# Allegro board touchcontroller.brd
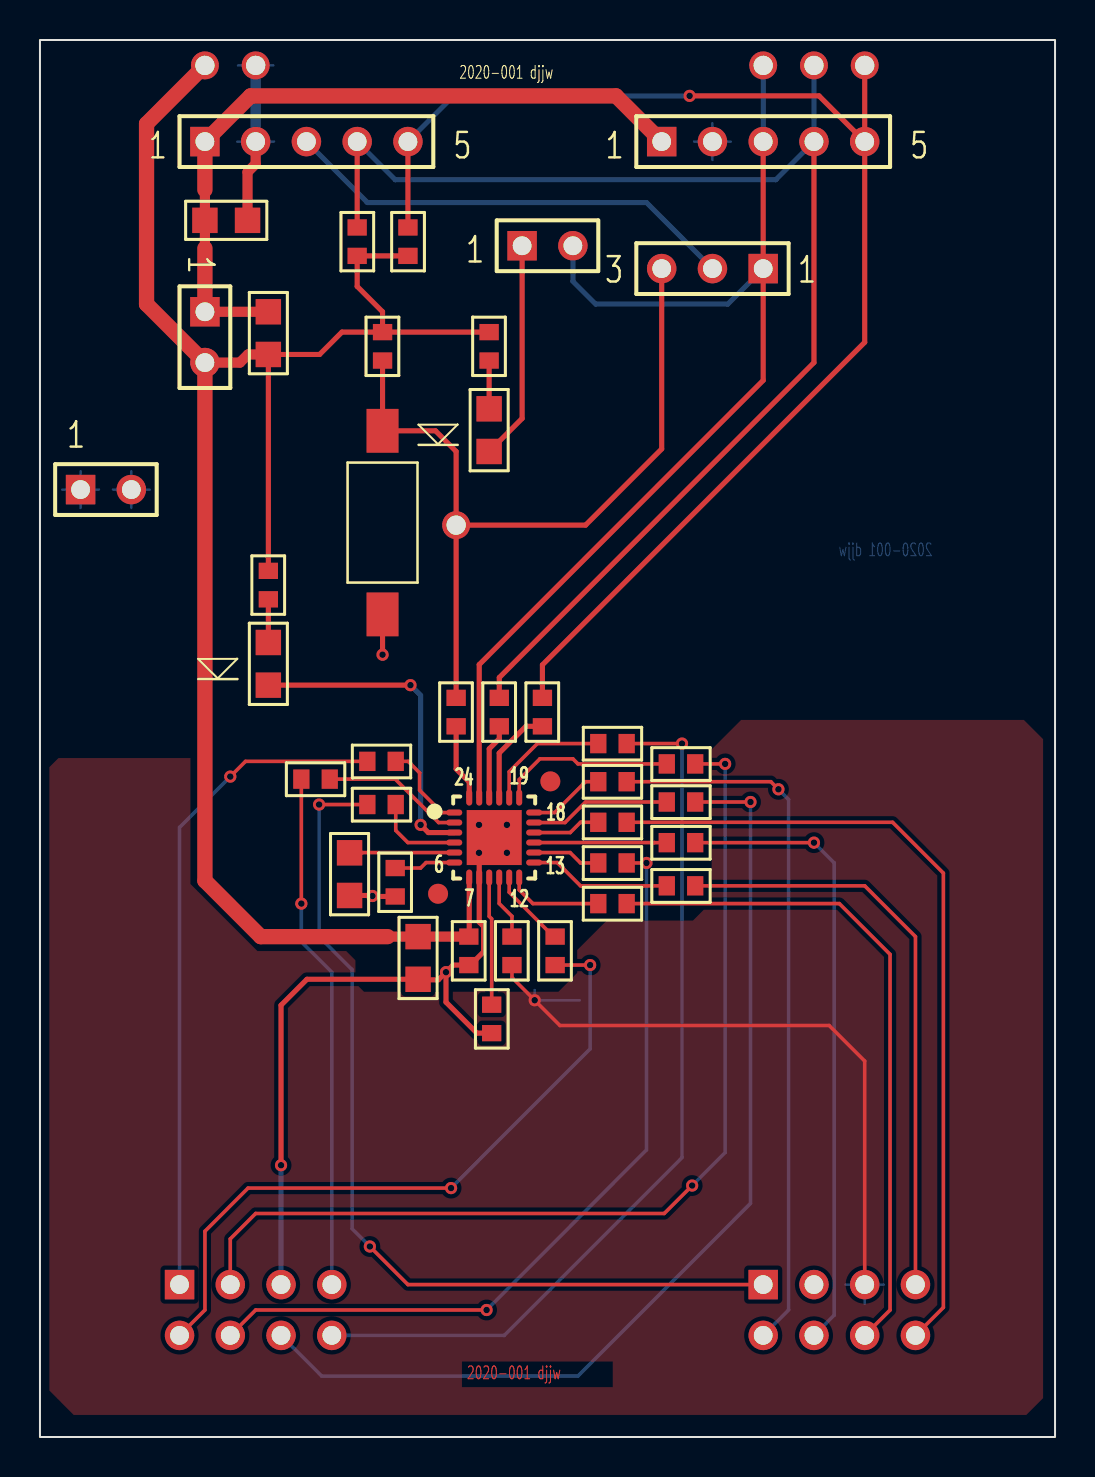
[diagram p0: board, top side]
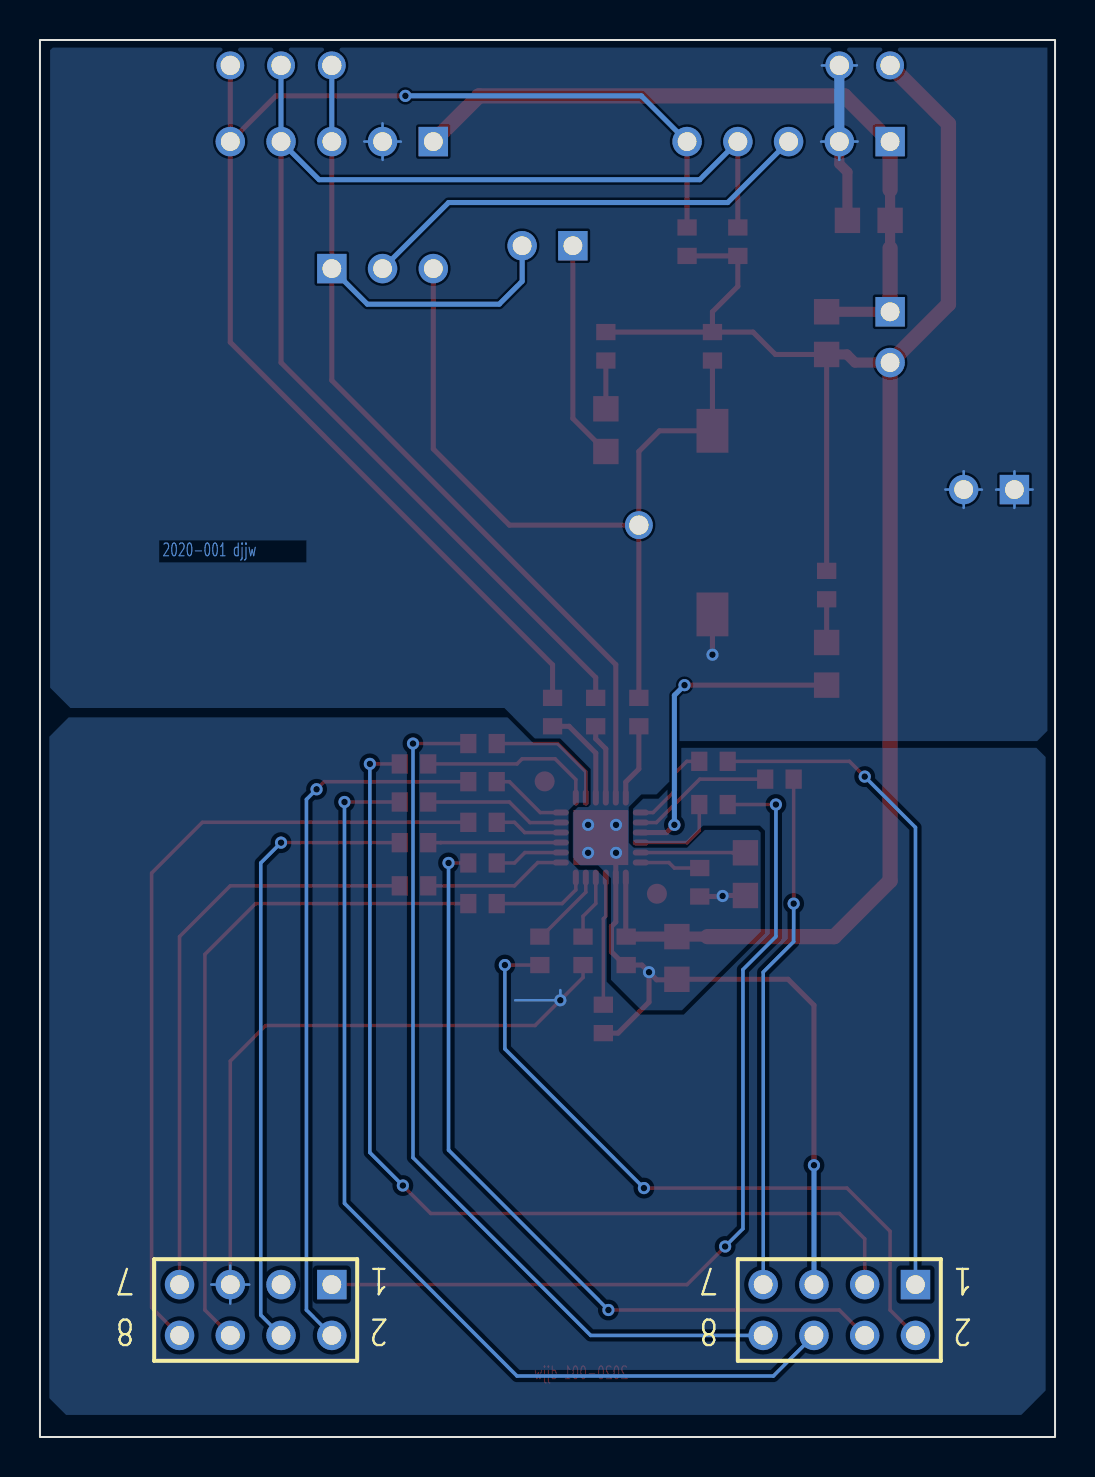
[diagram p1: board, bottom side, seen from below]

Outline 50.8 x 69.85 mm; copper layers: TOP, BOTTOM. Coordinates in mm from the lower left corner of the outline.
Outline path: rectangle 0,0 50.8,69.85

## Design rules (mm)
constraint set DEFAULT: min track width 0.127

## Placement (name value [footprint] x y rotation side)
C1  1 uF  [SMC0805]  8.25 60.83 0 top
C2  2200 pF  [SMC0805]  15.49 29.21 270 top
C3  0.1 uF  [SMC0603]  17.78 28.45 270 top
C4  1 uF  [SMC0805]  18.92 25.02 270 top
C5  0.1 uF  [SMC0603]  21.46 25.02 270 top
D1  LED  [SMC0805]  22.48 49.28 90 top
D2  LED  [SMC0805]  11.43 37.59 90 top
J1  Measure  [BLKCON100VHTM1SQW1002]  8.25 56.26 270 top
J2  MiniProg3  [BLKCON100VHTM1SQW1005]  8.25 64.77 0 top
J3  HEADER 2/SM  [BLKCON100VHTM1SQW1002]  24.13 59.56 0 top
J4  Host  [BLKCON100VHTM1SQW1005]  31.11 64.77 0 top
J5  CON8A  [BLKCON100VHTM2OEW2008]  6.98 7.62 0 bottom
J6  HEADER 2/SM  [BLKCON100VHTM1SQW1002]  2.03 47.37 0 top
J7  CON8A  [BLKCON100VHTM2OEW2008]  36.19 7.62 0 bottom
R1  0  [SMR0805]  11.43 56.26 270 top
R2  4.7k  [SMR0603]  17.14 55.25 270 top
R3  4.7k  [SMR0603]  15.88 59.06 90 top
R4  4.7k  [SMR0603]  18.41 59.06 90 top
R5  2.7k  [SMR0603]  22.48 55.25 270 top
R6  330  [SMR0603]  20.83 36.96 270 top
R7  330  [SMR0603]  22.99 36.96 270 top
R8  330  [SMR0603]  25.15 36.96 270 top
R9  2.7k  [SMR0603]  11.43 43.31 270 top
R10  560  [SMR0603]  27.94 34.67 0 top
R11  560  [SMR0603]  31.37 33.66 0 top
R12  560  [SMR0603]  16.38 33.78 0 top
R13  560  [SMR0603]  27.94 32.77 0 top
R14  560  [SMR0603]  13.08 32.89 0 top
R15  560  [SMR0603]  31.37 31.75 0 top
R16  560  [SMR0603]  27.94 30.73 0 top
R17  560  [SMR0603]  16.38 31.62 0 top
R18  560  [SMR0603]  31.37 29.72 0 top
R19  560  [SMR0603]  27.94 28.7 0 top
R20  560  [SMR0603]  31.37 27.56 0 top
R21  0  [SMR0603]  22.61 20.19 90 top
R22  560  [SMR0603]  27.94 26.67 0 top
R23  560  [SMR0603]  25.78 25.02 270 top
R24  560  [SMR0603]  23.62 25.02 270 top
SW1  SW_SL_SPDT  [BLKCON100VHTM1SQW1003]  36.19 58.42 180 top
SW2  RESET  [TE_FSMSM]  17.14 45.72 90 top
TP1  Vddd  [TP]  8.25 68.58 0 top
TP2  SCL  [TP]  38.73 68.58 0 top
TP3  SDA  [TP]  41.27 68.58 0 top
TP4  INT  [TP]  36.19 68.58 0 top
TP5  XRES  [TP]  20.83 45.59 0 top
TP6  GND  [TP]  10.79 68.58 0 top
U1  CY8C4014LQI-422  [QFN50P400X400X60-25N]  22.73 29.97 0 top

## Library data of the parts
C1-C5 = CAP NP
D1 D2 = LED
J1 J3 J6 = HEADER 2/SM
J2 J4 = CON5
J5 J7 = CON8A
R1-R24 = RESISTOR
SW1 = SW_SL_SPDT
SW2 = SW PUSHBUTTON
TP1-TP6 = T POINT R
U1 = PSoC 4S0_1

## Footprints (pads in the part's own frame, mm; a bottom-side part is the same pattern mirrored in y, then rotated)
BLKCON100VHTM1SQW1002
  rect 1.473x1.473 hole 0.94: 1(0,0)
  round 1.473 hole 0.94: 2(2.54,0)
BLKCON100VHTM1SQW1003
  rect 1.473x1.473 hole 0.94: 1(0,0)
  round 1.473 hole 0.94: 2(2.54,0) 3(5.08,0)
BLKCON100VHTM1SQW1005
  rect 1.473x1.473 hole 0.94: 1(0,0)
  round 1.473 hole 0.94: 2(2.54,0) 3(5.08,0) 4(7.62,0) 5(10.16,0)
BLKCON100VHTM2OEW2008
  rect 1.473x1.473 hole 0.94: 1(0,0)
  round 1.473 hole 0.94: 2(0,2.54) 3(2.54,0) 4(2.54,2.54) 5(5.08,0) 6(5.08,2.54) 7(7.62,0) 8(7.62,2.54)
QFN50P400X400X60-25N
  round 1 smd: (-2.809,-2.809) (2.809,2.809)
  oval 0.8x0.3 smd: 1(-2,1.25) 2(-2,0.75) 3(-2,0.25) 4(-2,-0.25) 5(-2,-0.75) 6(-2,-1.25) 13(2,-1.25) 14(2,-0.75) 15(2,-0.25) 16(2,0.25) 17(2,0.75) 18(2,1.25)
  oval 0.3x0.8 smd: 7(-1.25,-2) 8(-0.75,-2) 9(-0.25,-2) 10(0.25,-2) 11(0.75,-2) 12(1.25,-2) 19(1.25,2) 20(0.75,2) 21(0.25,2) 22(-0.25,2) 23(-0.75,2) 24(-1.25,2)
  rect 2.75x2.75 smd: 25(0,0)
SMC0603
  rect 0.813x0.965 smd: 1(0,0) 2(1.422,0)
SMC0805
  rect 1.27x1.27 smd: 1(0,0) 2(2.134,0)
SMR0603
  rect 0.813x0.965 smd: 1(0,0) 2(1.422,0)
SMR0805
  rect 1.27x1.27 smd: 1(0,0) 2(2.134,0)
TE_FSMSM
  rect 2.19x1.6 smd: 1(-4.59,0) 2(4.59,0)
TP
  round 1.397 hole 0.965: 1(0,0)

## Nets
GND_SIGNAL: C1.2 C2.2 C3.2 C4.2 C5.2 J2.2 J4.2 J5.5 J6.1 J6.2 R21.1 SW2.1 TP6.1(TP) U1.8 U1.25
VDDD: C4.1 C5.1 J1.2 R1.2 R2.1 R3.1 R4.1 R5.1 R9.1 TP1.1(TP) U1.7
/XRES: R2.2 R6.1 SW1.3 SW2.2 TP5.1(TP)
BTN0: J7.7 R20.2
BTN1: J5.7 R14.1
BTN2: J5.2 R23.2
BTN3: J7.1 R17.1
BTN4: J5.8 R10.2
BTN5: J5.3 R11.2
BTN6: J7.2 R13.2
BTN7: J5.6 R15.2
BTN8: J7.8 R16.2
BTN9: J7.4 R18.2
BTNC: J5.4 R19.2
BTNE: J7.6 R22.2
INT: J3.2 J4.3 SW1.1 TP4.1(TP) U1.23
PROX: J5.1 R12.1
RESET/INT: J2.3 SW1.2
SCL/SWDCLK: J2.4 J4.4 R3.2 R7.1 TP2.1(TP)
SDA/SWDIO: J2.5 J4.5 R4.2 R8.1 TP3.1(TP)
SHLD: J7.5 R24.2
N01106: C2.1 U1.5
N03409: C1.1 J1.1 J2.1 J4.1 R1.1
N03591: C3.1 U1.6
N06490: D2.1(CATHODE) U1.3
N08132: D1.1(CATHODE) J3.1
N08138: D1.2 R5.2
N35015: R11.1 U1.19
N35037: R10.1 U1.20
N35044: R8.2 U1.21
N35048: R7.2 U1.22
N35068: R6.2 U1.24(X\R\E\S\)
N35296: R22.1 U1.12
N35303: R23.1 U1.11
N35310: R24.1 U1.10
N038970: D2.2 R9.2
N044961: R12.2 U1.1
N045221: R14.2 U1.2
N045481: R17.2 U1.4
N046560: R13.1 U1.18
N046820: R15.1 U1.17
N047080: R16.1 U1.16
N047340: R18.1 U1.15
N047600: R19.1 U1.14
N047860: R20.1 U1.13
N088111: R21.2 U1.9

Pads without a net: J7 3

## Via types
v1: diameter 0.61, hole 0.33, TOP to BOTTOM, 26 vias

## Routing (per net, layer and track width the routed paths; a pad name or vN(x,y) marks a point on that pad's centre or on a via; arc(x,y) is an arc through that point)
GND_SIGNAL: length 63.5
  TOP w0.254: v1(20.32,23.24) 20.32,21.74 21.87,20.19 R21.1 ; v1(20.32,23.24) 19.94,22.86 18.95,22.86 C4.2 13.36,22.89 12.06,21.59 v1(12.06,13.59) ; v1(20.32,23.24) 20.68,23.6 C5.2 21.54,23.6 22.2,24.26 22.2,25.53 21.98,25.75 U1.8 21.98,28.71 22.73,29.46 U1.25 ; C2.2 16.61,27.08 v1(16.64,27.05) 16.66,27.03 C3.2 ; SW2.1 v1(17.14,39.12)
  TOP w0.508: J2.2 10.79,63.65 10.39,63.25 C1.2
  BOTTOM w0.127: J6.1 2.95,47.37 ; J6.1 2.03,48.29 ; J6.1 2.03,46.46 ; J6.1 1.12,47.37 ; 10.79,63.86 J2.2 ; J2.2 9.88,64.77 ; J2.2 11.71,64.77 ; J6.2 5.49,47.37 ; J6.2 4.57,48.29 ; J6.2 4.57,46.46 ; J6.2 3.66,47.37 ; J4.2 33.65,65.68 ; J4.2 34.57,64.77 ; J4.2 33.65,63.86 ; J4.2 32.74,64.77 ; 9.92,68.58 TP6.1 11.67,68.58
  BOTTOM w0.254: J5.5 v1(12.06,13.59)
  BOTTOM w0.508: J2.2 TP6.1
  vias: v1(21.97,30.61) v1(21.97,29.21) v1(23.37,30.61) v1(23.37,29.21)
VDDD: length 93.1
  TOP w0.254: R5.1 R2.1 ; R2.1 17.14,56.26 15.88,57.53 R3.1 R4.1 ; R2.1 15.11,55.25 14,54.13 R1.2 R9.1 ; C5.1 21.48,25.04 U1.7
  TOP w0.508: J1.2 10.01,53.72 10.41,54.13 R1.2 ; C5.1 C4.1 17.4,25.02
  TOP w0.762: TP1.1 5.33,65.66 5.33,56.64 J1.2 8.25,27.81 11.05,25.02 17.4,25.02
/XRES: length 40.8
  TOP w0.254: TP5.1 20.83,49.28 19.79,50.31 SW2.2 R2.2 ; TP5.1 27.3,45.59 31.11,49.4 SW1.3 ; TP5.1 R6.1
BTN0: length 29.5
  TOP w0.178: R20.2 41.27,27.56 43.81,25.02 J7.7
BTN1: length 25.9
  TOP w0.178: R14.1 v1(13.08,26.67)
  BOTTOM w0.178: J5.7 14.6,23.24 13.08,24.77 v1(13.08,26.67)
BTN2: length 34.7
  TOP w0.178: R23.2 v1(27.53,23.6) ; v1(20.57,12.45) 10.41,12.45 8.25,10.29 8.25,6.35 J5.2
  BOTTOM w0.178: v1(27.53,23.6) 27.53,19.41 v1(20.57,12.45)
BTN3: length 46
  TOP w0.178: R17.1 v1(13.97,31.62) ; v1(16.51,9.53) 18.41,7.62 J7.1
  BOTTOM w0.178: v1(16.51,9.53) 15.62,10.41 15.62,23.37 13.97,25.02 v1(13.97,31.62)
BTN4: length 44.7
  TOP w0.178: R10.2 v1(32.13,34.67)
  BOTTOM w0.178: J5.8 23.24,5.08 32.13,13.97 v1(32.13,34.67)
BTN5: length 49.8
  TOP w0.178: R11.2 v1(34.29,33.66) ; J5.3 9.52,9.91 10.79,11.18 31.24,11.18 v1(32.64,12.57)
  BOTTOM w0.178: v1(34.29,33.66) 34.29,14.22 v1(32.64,12.57)
BTN6: length 35.8
  TOP w0.178: v1(36.96,32.39) 36.58,32.77 R13.2
  BOTTOM w0.178: v1(36.96,32.39) 37.46,31.88 37.46,6.35 J7.2
BTN7: length 50.7
  TOP w0.178: R15.2 v1(35.56,31.75)
  BOTTOM w0.178: J5.6 14.1,3.05 26.92,3.05 35.56,11.68 v1(35.56,31.75)
BTN8: length 40.6
  TOP w0.178: R16.2 42.67,30.73 45.21,28.19 45.21,6.48 J7.8
BTN9: length 31.4
  TOP w0.178: v1(38.73,29.72) R18.2
  BOTTOM w0.178: J7.4 39.75,6.1 39.75,28.7 v1(38.73,29.72)
BTNC: length 40
  TOP w0.178: J5.4 10.79,6.35 v1(22.35,6.35) ; R19.2 v1(30.35,28.7)
  BOTTOM w0.178: v1(30.35,28.7) 30.35,14.35 v1(22.35,6.35)
BTNE: length 33.8
  TOP w0.178: R22.2 40,26.67 42.54,24.13 42.54,6.35 J7.6
INT: length 55
  TOP w0.254: U1.23 21.98,38.62 36.19,52.83 SW1.1 J4.3
  BOTTOM w0.254: J4.3 TP4.1 ; J3.2 26.67,57.78 27.81,56.64 34.42,56.64 SW1.1
PROX: length 33.6
  TOP w0.178: R12.1 10.29,33.78 v1(9.52,33.02)
  BOTTOM w0.178: J5.1 6.98,30.48 v1(9.52,33.02)
RESET/INT: length 23
  BOTTOM w0.254: J2.3 16.38,61.72 30.35,61.72 SW1.2
SCL/SWDCLK: length 66.9
  TOP w0.254: J4.4 38.73,53.72 22.99,37.97 R7.1 ; R3.2 J2.4
  BOTTOM w0.254: TP2.1 J4.4 36.83,62.87 17.78,62.87 J2.4
SDA/SWDIO: length 67.4
  TOP w0.254: J4.5 38.99,67.06 v1(32.51,67.06) ; J4.5 41.27,54.74 25.15,38.61 R8.1 ; J4.5 TP3.1 ; R4.2 J2.5
  BOTTOM w0.254: J2.5 20.7,67.06 v1(32.51,67.06)
SHLD: length 38.2
  TOP w0.178: J7.5 41.27,18.8 39.5,20.57 26.02,20.57 v1(24.76,21.84) 23.62,22.97 R24.2
  BOTTOM w0.127: 41.27,6.67 J7.5 ; J7.5 42.23,7.62 ; J7.5 41.27,8.57 ; J7.5 40.32,7.62 ; v1(24.76,21.84) 24.76,22.35 ; v1(24.76,21.84) 24.76,21.62 ; v1(24.76,21.84) 27.02,21.84 ; v1(24.76,21.84) 24.54,21.84
N01106: length 5.2
  TOP w0.178: U1.5 16.14,29.22 16.13,29.21 C2.1
N03409: length 36.4
  TOP w0.508: 8.25,62.36 C1.1 8.25,59.44 ; J1.1 R1.1
  TOP w0.762: J1.1 8.25,59.44 ; 8.25,62.36 J2.1 10.54,67.06 28.83,67.06 J4.1
N03591: length 3.1
  TOP w0.178: C3.1 19.05,28.45 19.32,28.72 U1.6
N06490: length 16.1
  TOP w0.254: v1(19.05,30.61) 19.44,30.22 U1.3 ; v1(18.54,37.59) D2.1
  BOTTOM w0.254: v1(19.05,30.61) 19.05,37.08 v1(18.54,37.59)
N08132: length 11
  TOP w0.254: J3.1 24.13,50.93 D1.1
N08138: length 2.4
  TOP w0.254: R5.2 D1.2
N35015: length 8.8
  TOP w0.178: U1.19 23.98,32.87 25.02,33.91 26.67,33.91 26.92,33.66 R11.1
N35037: length 6.3
  TOP w0.178: U1.20 23.48,33.26 24.89,34.67 R10.1
N35044: length 4.9
  TOP w0.254: R8.2 24.32,35.53 22.98,34.2 U1.21
N35048: length 3.8
  TOP w0.254: U1.22 22.48,34.41 22.99,34.91 R7.2
N35068: length 3.8
  TOP w0.254: R6.2 20.83,33.4 21.48,32.75 U1.24
N35296: length 4.9
  TOP w0.178: U1.12 23.98,27.36 24.67,26.67 R22.1
N35303: length 3.9
  TOP w0.178: R23.1 25.7,25.02 23.48,27.24 U1.11
N35310: length 3.2
  TOP w0.178: U1.10 22.98,26.67 23.62,26.03 R24.1
N038970: length 2.2
  TOP w0.254: D2.2 R9.2
N044961: length 4.5
  TOP w0.178: R12.2 18.43,33.78 19,33.21 19,32.34 20.12,31.22 U1.1
N045221: length 7.1
  TOP w0.178: R14.2 17.78,32.89 19.95,30.72 U1.2
N045481: length 4.5
  TOP w0.178: R17.2 17.81,30.33 18.41,29.72 U1.4
N046560: length 3.8
  TOP w0.178: U1.18 25.76,31.22 27.3,32.77 R13.1
N046820: length 7.1
  TOP w0.178: R15.1 27.3,31.75 26.28,30.72 U1.17
N047080: length 3.4
  TOP w0.178: U1.16 26.54,30.22 27.05,30.73 R16.1
N047340: length 6.6
  TOP w0.178: R18.1 30.75,29.72 30.74,29.72 U1.15
N047600: length 3.4
  TOP w0.178: R19.1 27.05,28.7 26.53,29.22 U1.14
N047860: length 7.1
  TOP w0.178: U1.13 25.89,28.72 27.05,27.56 R20.1
N088111: length 6.4
  TOP w0.178: R21.2 22.61,25.91 22.48,26.03 U1.9

## Copper pours and planes (outline as drawn; the poured copper is in the pictures)
GND_SIGNAL on BOTTOM: 0.38,69.47 0.38,35.31 0.89,34.8 19.3,34.8 19.3,32.77 19.94,32.13 20.7,32.13 21.34,31.5 21.34,29.72 21.08,29.46 18.41,29.46 17.53,30.35 14.86,30.35 14.73,30.23 14.73,25.27 18.67,21.34 20.7,21.34 22.22,22.86 22.22,27.94 22.86,28.58 23.75,28.58 24.13,28.96 24.13,31.24 23.88,31.5 23.37,31.5 23.24,31.62 23.24,33.4 24.76,34.93 26.03,34.93 27.56,36.45 49.28,36.45 50.29,37.47 50.29,69.34 50.16,69.47
SHLD on TOP: 35.05,35.94 49.28,35.94 50.29,34.93 50.29,1.91 49.4,1.02 1.65,1.02 0.38,2.29 0.38,33.53 0.89,34.04 7.62,34.04 7.62,27.69 10.92,24.38 15.37,24.38 15.88,23.88 15.88,22.73 16.26,22.35 25.91,22.35 26.8,23.24 26.8,24.38 28.32,25.91 32.64,25.91 33.53,26.8 33.53,34.42
SHLD on BOTTOM: 25.65,36.07 49.4,36.07 50.42,35.05 50.42,1.91 49.53,1.02 1.65,1.02 0.38,2.29 0.38,34.04 0.89,34.54 24.13,34.54

## Text on the board
BOTTOM: 2020-001 djjw
TOP: 2020-001 djjw
Ref Des/Silkscreen Top: 2020-001 djjw
